# EAGLE board tester (EAGLE 6.1)
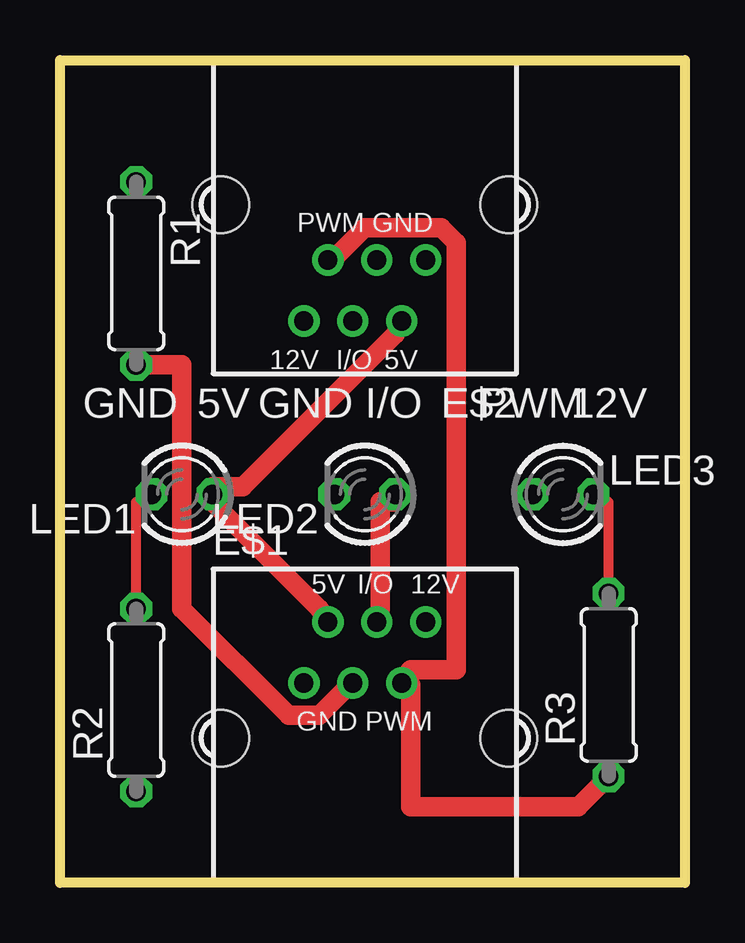
[diagram p0: board, top side]
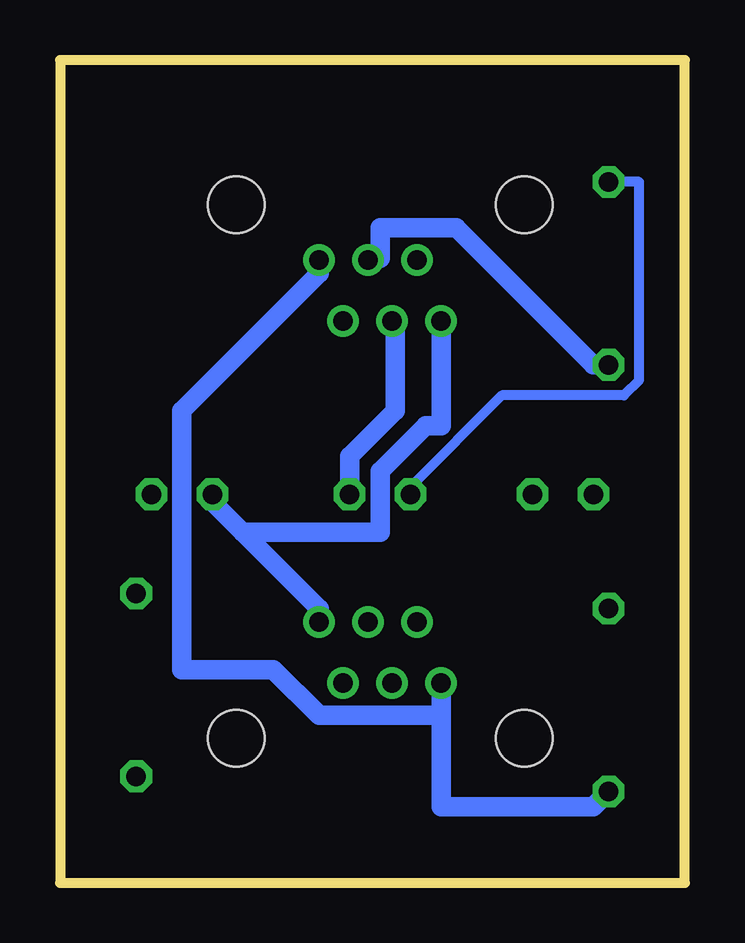
[diagram p1: board, bottom side, seen from below]

Size 26.04 x 34.29 mm. Coordinates in mm from the lower left corner, seen from the top.
Outline: 0,34.29 26.04,34.29 26.04,0 0,0 0,34.29
Copper layers (1*16): Top 0.035mm / dielectric 1.5mm / Bottom 0.035mm
Design rules: minimum track width 10mil, minimum drill 24mil, track to track 8mil, track to pad 8mil, pad to pad 8mil, via to via 8mil, smd to smd 8mil, copper to edge 40mil, drill to drill 8mil, minimum pad ring 10mil, minimum via ring 8mil, stop-mask expansion 4mil, vias tented up to drill 0mil, thermal gap 10mil
Net classes: 0 default: width 0.406 mm; 1 power: width 0.813 mm
Milling: 4 lines

## Footprints (pad centres in the part's own frame; a part is rotated, then mirrored left to right if it is on the bottom)
YH-55-10 = drill 0.8 pad 1.3: 1 -2.54,2.3; 2 -1.54,4.84; 3 -0.5,2.3; 4 0.5,4.84; 5 1.54,2.3; 6 2.54,4.84 | hole 2.36: -6,0; 6,0
LED3MM = drill 0.813 octagon: A -1.27,0; K 1.27,0
0207/7 = drill 0.813 octagon: 1 -3.81,0; 2 3.81,0

## Placement (x,y rotation side)
E$1  [YH-55-10]  12.7,6.03 0 top
E$2  [YH-55-10]  12.7,28.26 180 top
LED1  [LED3MM]  5.08,16.19 180 top
LED2  [LED3MM]  12.7,16.19 180 top
LED3  [LED3MM]  20.95,16.19 0 top
R1  1K  [0207/7]  3.17,25.4 270 top
R2  1K  [0207/7]  3.17,7.62 90 top
R3  1K  [0207/7]  22.86,8.26 90 top

## Library data of the parts
E$1 E$2 = lpatiny
LED1-LED3 = led
R1-R3 = rcl

## Nets
S$1 [power]: E$1.6 E$2.6 LED3.A
S$2 [power]: E$1.5 E$2.5 R3.1
S$3 [power]: E$1.4 E$2.4 LED2.A
S$4 [power]: E$1.3 E$2.3 R1.2
S$5 [power]: E$1.2 E$2.2 LED1.A
S$6 [power]: E$1.1 E$2.1 R2.1
S$7: LED1.K R2.2
S$8: LED2.K R1.1
S$9: LED3.K R3.2

## Tracks (layer width: path | path; a pad name or v marks a point on that pad's centre or on a via)
S$1
  Bottom 0.813: 18.41,14.61 19.68,15.88 LED3.A | 18.41,14.61 15.24,11.43 E$1.6 | 18.41,14.61 12.7,14.61 12.7,17.14 10.79,19.05 10.16,19.05 E$2.6
S$2
  Top 0.813: R3.1 21.59,3.17 14.61,3.17 14.61,8.26 E$1.5 14.61,8.89 16.51,8.89 16.51,26.67 15.88,27.3 12.7,27.3 11.43,26.04 E$2.5
S$3
  Top 0.813: E$1.4 13.34,11.43 13.34,15.88 13.97,15.88 LED2.A
  Bottom 0.813: E$2.4 12.06,22.86 12.06,19.68 13.97,17.78 LED2.A
S$4
  Top 0.813: R1.2 5.08,21.59 5.08,11.43 9.53,6.99 10.79,6.99 12.06,8.26 E$1.3
  Bottom 0.813: R1.2 3.81,21.59 9.53,27.3 12.7,27.3 12.7,26.04 E$2.3
S$5
  Top 0.813: E$1.2 10.79,11.43 6.35,15.88 LED1.A 6.35,16.51 7.62,16.51 13.97,22.86 E$2.2
S$6
  Bottom 0.813: 10.16,6.99 10.16,3.17 3.81,3.17 R2.1 | 10.16,6.99 E$1.1 | 10.16,6.99 15.24,6.99 17.14,8.89 20.95,8.89 20.95,19.68 15.24,25.4 E$2.1
S$7
  Top 0.406: R2.2 3.17,15.88 3.81,15.88 LED1.K
S$8
  Bottom 0.406: R1.1 1.91,29.21 1.91,20.95 2.54,20.32 7.62,20.32 11.43,16.51 LED2.K
S$9
  Top 0.406: R3.2 22.86,15.88 22.23,15.88 LED3.K

## Text on the board
tPlace: GND | 5V | GND | I/O | PWM | 12V